# Altium PCB TAUV-Interfacer.PcbDoc (part 2 of 2)
Units mil, origin at the board's own origin, x right, y up, seen from the top; angles counter-clockwise.
Board outline 4460 x 2770 mil, 4 copper layers (Component Side, Ground Plane, Power Plane, Solder Side), stack 33.234 mil thick; 196 components, 135 nets, 730 pads, 0 vias.
Unrouted connection lines stored in the file: 437.
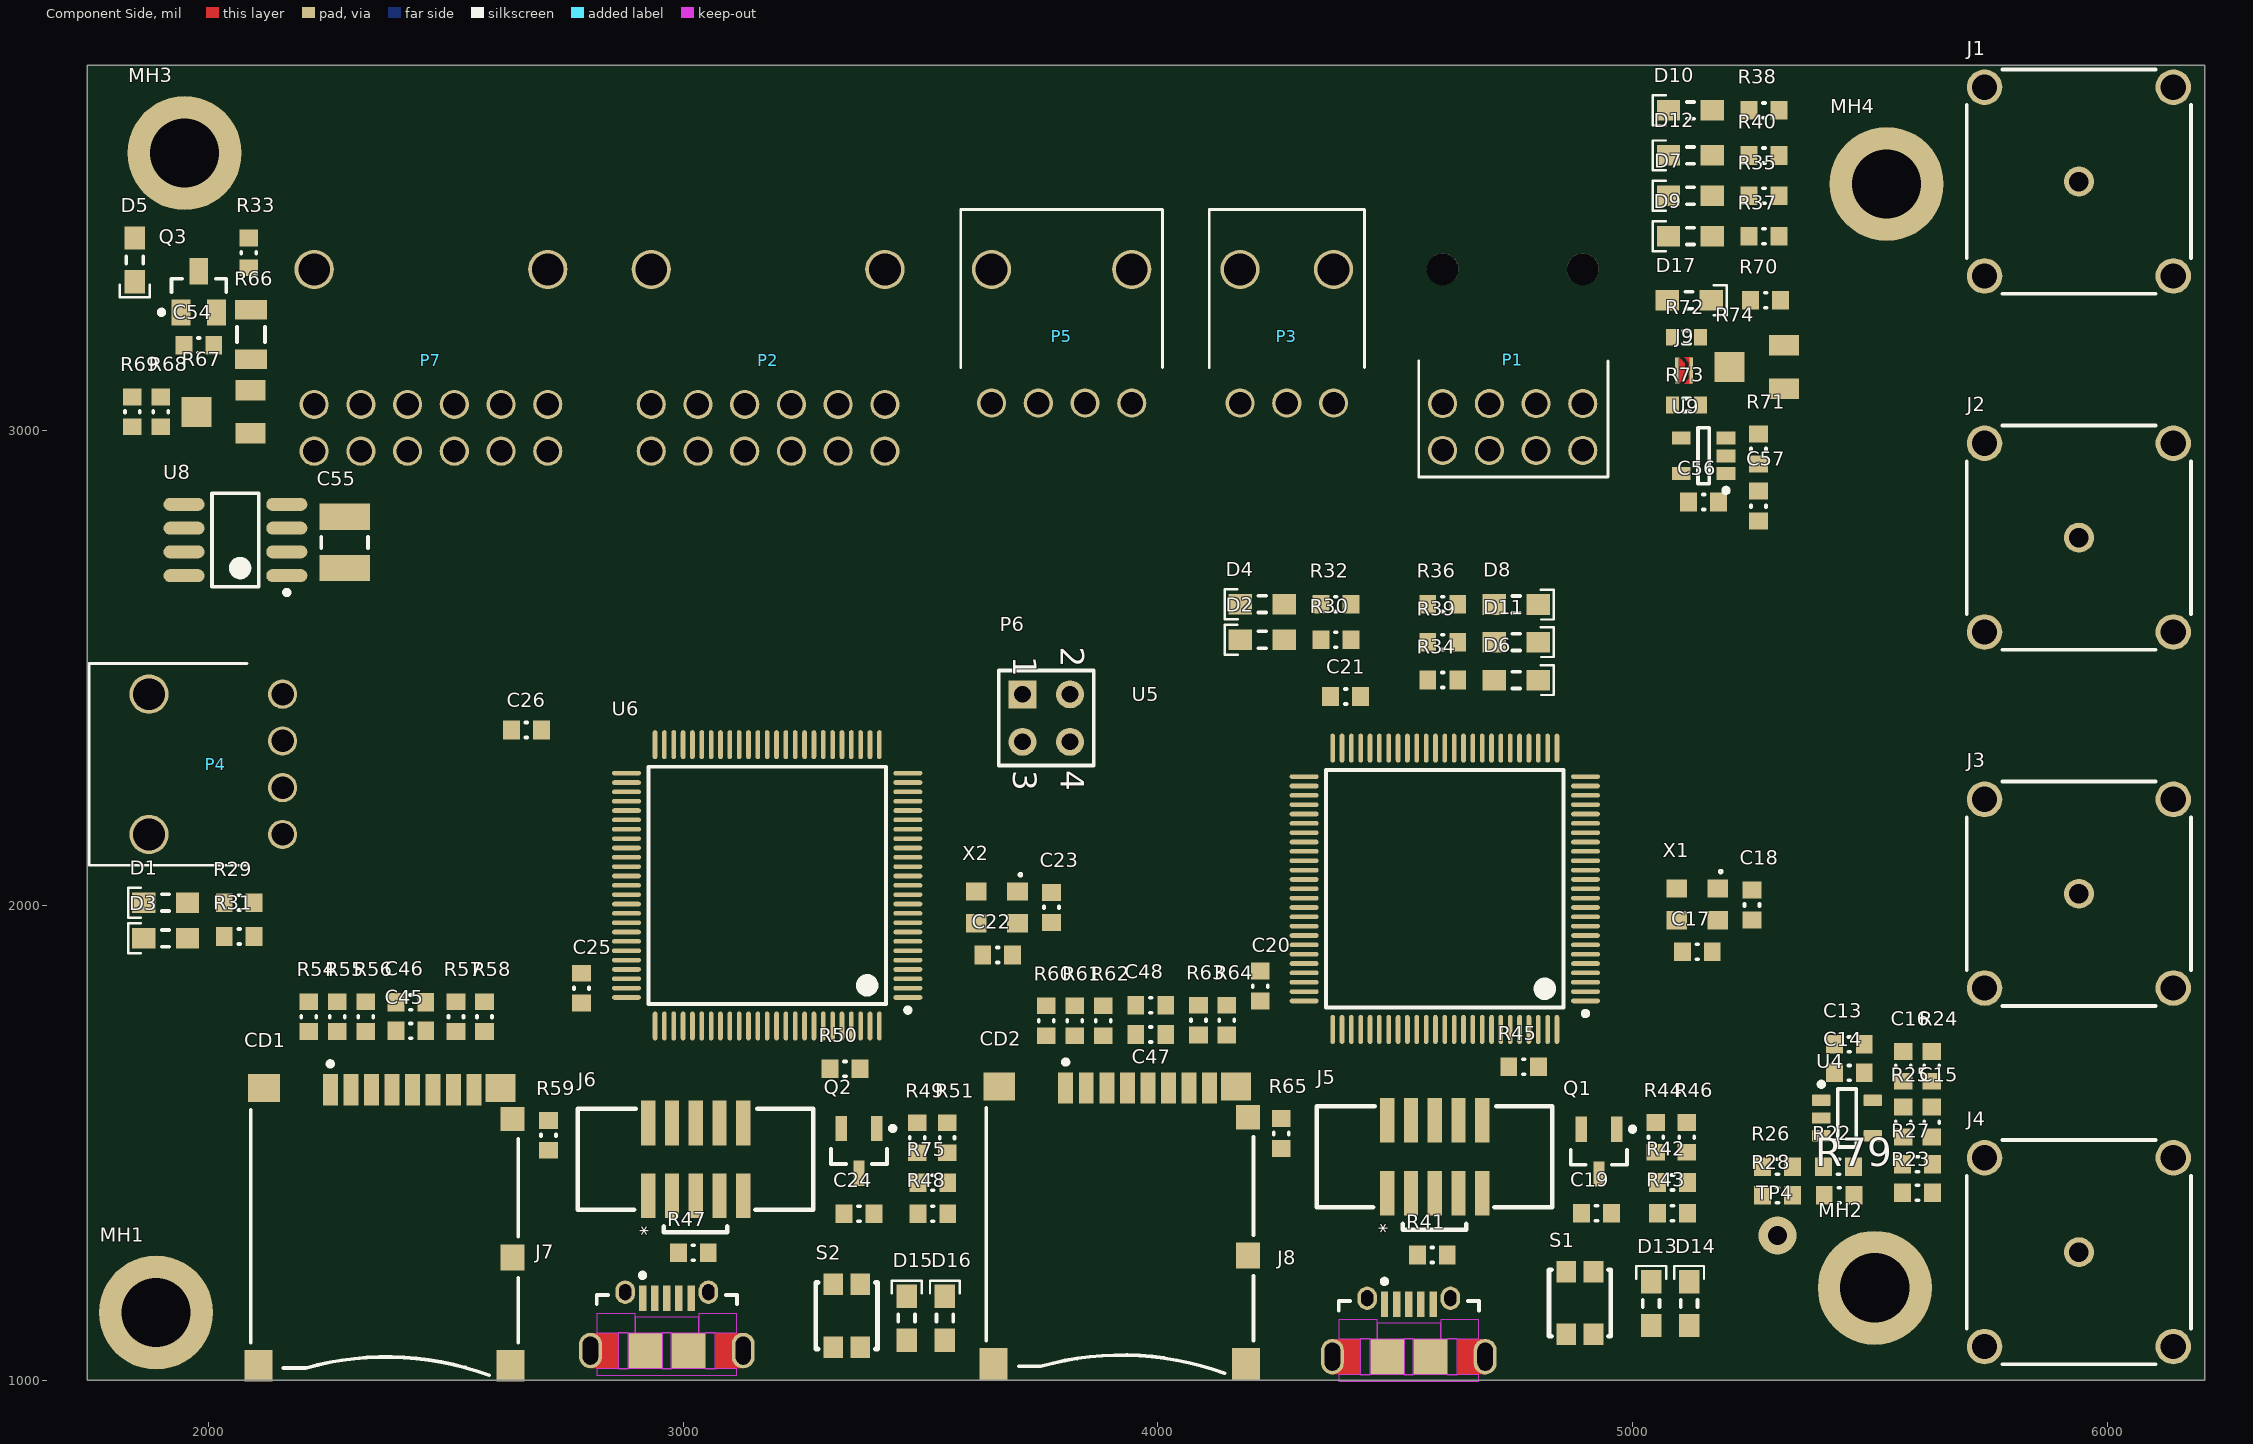
[diagram p0: Component Side view]

## Part data (continued)
X1 X2: "CRYSTAL 25.0000MHZ 10PF SMD", Case/Package=SMD/SMT, ESR (Equivalent Series Resistance)=60R, Frequency=25MHz, Frequency Stability=10ppm, Load Capacitance=10pF, Manufacturer 1=TXC, Max Operating Temperature=70°C, Min Operating Temperature=-20°C, Package Quantity=3000, Supplier Part Number 1=887-1326-1-ND, ComponentLink1Description=https://datasheet.ciiva.com/26918/getdatasheetpartid-757227-26918816.pdf, ComponentLink1URL=https://datasheet.ciiva.com/26918/getdatasheetpartid-757227-26918816.pdf, ComponentLink2Description=https://datasheet.ciiva.com/856/7m-accuracy-856022.pdf, ComponentLink2URL=https://datasheet.ciiva.com/856/7m-accuracy-856022.pdf, ComponentLink3Description=https://datasheet.ciiva.com/22658/1794111-22658486.pdf, ComponentLink3URL=https://datasheet.ciiva.com/22658/1794111-22658486.pdf, ComponentLink4Description=https://datasheet.ciiva.com/856/7m-accuracy-856023.pdf, ComponentLink4URL=https://datasheet.ciiva.com/856/7m-accuracy-856023.pdf, ComponentLink5Description=https://datasheet.ciiva.com/856/7m-accuracy-856024.pdf, ComponentLink5URL=https://datasheet.ciiva.com/856/7m-accuracy-856024.pdf, ComponentLink6Description=https://datasheet.ciiva.com/4946/7m-11184-4946126.pdf, ComponentLink6URL=https://datasheet.ciiva.com/4946/7m-11184-4946126.pdf, ComponentLink7Description=https://datasheet.ciiva.com/28498/1794111-28498878.pdf, ComponentLink7URL=https://datasheet.ciiva.com/28498/1794111-28498878.pdf, Depth=2.5mm, Frequency Tolerance=10ppm, Height=0.031inch, Length=3.2mm, Manufacturer Part Number 1=7M-25.000MEEQ-T, Mount="Surface Mount", Number of Pins=4, Packaging="Tape and Reel", Pricing 1="1=1.27, 10=1.209, 50=1.1812, 100=1.0125, 500=0.9844, 1000=0.8297 (USD)", REACH SVHC="No SVHC", Stock 1=17097, Supplier 1=Digi-Key, Termination=SMD/SMT, Tolerance=10ppm, Width=0.098inch

## Nets (pads, with @x,y where several pads share a name; then routed paths per layer and width w, separated by ;. In a path a pad name is that pad's centre, name@x,y a point inside that pad or via, vN(x,y) a via of type N, cw(c..) or ccw(c..) an arc to the next point about the centre after c; other vN are vias at no path point)
AVCC_3V3: C1.1 C2.2 C5.1 C6.2 C9.1 C10.2 C13.1 C14.2 C40.2 C41.2 C43.2 C44.2 C53.1 FB1.2 R2.2 R5.1 R9.2 R12.1 R16.2 R19.1 R23.2 R26.1 R52.1 R53.1 U1.2 U2.2 U3.2 U4.2 U5.21 U6.21
GND: C1.2 C2.1 C4.1 C5.2 C6.1 C8.1 C9.2 C10.1 C12.1 C13.2 C14.1 C16.1 C17.1 C18.1 C19.1 C20.1 C21.1 C22.1 C23.1 C24.1 C25.1 C26.1 C27.1 C28.1 C29.1 C30.1 C31.1 C32.1 C33.1 C34.1 C35.1 C36.1 C37.1 C38.1 C39.1 C40.1 C41.1 C42.1 C43.1 C44.1 C45.1 C46.1 C47.1 C48.1 C49.1 C50.1 C51.1 C52.1 C53.2 C55.1 C56.2 C57.1 CD1.6 CD1.10 CD1.11 CD1.12 CD1.13 CD1.14 CD2.6 CD2.10 CD2.11 CD2.12 CD2.13 CD2.14 D1.1 D2.1 D3.1 D4.1 D5.1 D6.1 D7.1 D8.1 D9.1 D10.1 D11.1 D12.1 J1.MH J2.MH J3.MH J4.MH J5.3 J5.5 J5.9 J6.3 J6.5 J6.9 J7.5 J7.6 J7.7 J7.8 J7.9 J7.10 J7.11 J8.5 J8.6 J8.7 J8.8 J8.9 J8.10 J8.11 MH1.0 MH2.0 MH3.0 MH4.0 P1.6 P1.7 P2.5 P2.6 P2.11 P2.12 P3.2 P5.1 P7.1 P7.6 P7.7 P7.12 Q1.2 Q2.2 R6.1 R7.1 R13.1 R14.1 R20.1 R21.1 R27.1 R28.1 R41.1 R44.2 R45.2 R46.2 R47.1 R49.2 R50.2 R51.2 R73.2 R74.3 S1.2 S2.2 U1.5 U2.5 U3.5 U4.5 U5.10 U5.19 U5.26 U5.49 U5.74 U5.99 U6.10 U6.19 U6.26 U6.49 U6.74 U6.99 U7.2 U8.4 U9.2 X1.2 X1.4 X2.2 X2.4
HALL_SENSE: P1.3 R70.2 U6.52 U8.2 U9.1
IND_PING: R34.1 U5.54
IND_SCAN: R39.1 U5.52
IND_SEARCH: R36.1 U5.53
MCU1_BOOT: D16.2 P2.2 R50.1 U6.94
MCU1_GPIO1: P4.1 U6.55
MCU1_GPIO2: P4.2 U6.56
MCU1_GPIO3: P4.3 U6.57
MCU1_GPIO4: P4.4 U6.58
MCU1_I2C_SCL: P1.8 P2.4 U6.46
MCU1_I2C_SDA: P1.4 P2.10 U6.47
MCU1_IND1: R29.1 U6.61
MCU1_IND2: R31.1 U6.62
MCU1_NRST: C24.2 J6.10 Q2.3 R48.2 R75.1 S2.1 U6.14
MCU1_OSC_IN: C22.2 U6.12 X2.3
MCU1_OSC_OUT: C23.2 U6.13 X2.1
MCU1_PWM0: P7.3 U6.39
MCU1_PWM1: P7.4 U6.41
MCU1_PWM2: P7.5 U6.43
MCU1_PWM3: P7.9 U6.44
MCU1_PWM4: P7.10 U6.34
MCU1_PWM5: P7.11 U6.35
MCU1_SD_CK: CD1.5 U6.80
MCU1_SD_CMD: CD1.3 R56.1 U6.83
MCU1_SD_D0: CD1.7 R57.1 U6.65
MCU1_SD_D1: CD1.8 R58.1 U6.66
MCU1_SD_D2: CD1.1 R54.1 U6.78
MCU1_SD_D3: CD1.2 R55.1 U6.79
MCU1_SD_DETECT: CD1.9 R59.1 U6.64
MCU1_SPI1_MOSI: P5.3 U6.31
MCU1_SPI1_SCK: P5.2 U6.29
MCU1_TCK: J6.4 U6.76
MCU1_TDI: J6.8 U6.77
MCU1_TDO: J6.6 U6.89
MCU1_TMS: J6.2 U6.72
MCU1_UART4_RX: P2.7 U6.23
MCU1_UART4_TX: P2.1 U6.22
MCU1_USART2_RX: P6.3 U6.25
MCU1_USART2_TX: P6.1 U6.24
MCU1_USB_DM: J7.2 U6.70
MCU1_USB_DP: J7.3 U6.71
MCU2_ADC1_IN10: R76.2 TP1.1 U5.15
MCU2_ADC1_IN11: R77.2 TP2.1 U5.16
MCU2_ADC1_IN12: R78.2 TP3.1 U5.17
MCU2_ADC1_IN13: R79.2 TP4.1 U5.18
MCU2_BOOT: D14.2 P2.8 R45.1 U5.94
MCU2_IND1: R30.1 U5.61
MCU2_IND2: R32.1 U5.62
MCU2_NRST: C19.2 J5.10 Q1.3 R42.1 R43.2 S1.1 U5.14
MCU2_OSC_IN: C17.2 U5.12 X1.3
MCU2_OSC_OUT: C18.2 U5.13 X1.1
MCU2_SD_CK: CD2.5 U5.80
MCU2_SD_CMD: CD2.3 R62.1 U5.83
MCU2_SD_D0: CD2.7 R63.1 U5.65
MCU2_SD_D1: CD2.8 R64.1 U5.66
MCU2_SD_D2: CD2.1 R60.1 U5.78
MCU2_SD_D3: CD2.2 R61.1 U5.79
MCU2_SD_DETECT: CD2.9 R65.1 U5.64
MCU2_TCK: J5.4 U5.76
MCU2_TDI: J5.8 U5.77
MCU2_TDO: J5.6 U5.89
MCU2_TMS: J5.2 U5.72
MCU2_USART2_RX: P6.2 U5.25
MCU2_USART2_TX: P6.4 U5.24
MCU2_USB_DM: J8.2 U5.70
MCU2_USB_DP: J8.3 U5.71
NetC3_1: C3.1 C4.2 R3.2
NetC3_2: C3.2 R2.1 R4.1 R6.2
NetC7_1: C7.1 C8.2 R10.2
NetC7_2: C7.2 R9.1 R11.1 R13.2
NetC11_1: C11.1 C12.2 R17.2
NetC11_2: C11.2 R16.1 R18.1 R20.2
NetC15_1: C15.1 C16.2 R24.2
NetC15_2: C15.2 R23.1 R25.1 R27.2
NetC20_2: C20.2 U5.73
NetC21_2: C21.2 U5.48
NetC25_2: C25.2 U6.73
NetC26_2: C26.2 U6.48
NetC54_1: C54.1 U8.8
NetC57_2: C57.2 R71.2 U9.3
NetD1_2: D1.2 R29.2
NetD2_2: D2.2 R30.2
NetD3_2: D3.2 R31.2
NetD4_2: D4.2 R32.2
NetD5_2: D5.2 R33.1
NetD6_2: D6.2 R34.2
NetD7_2: D7.2 R35.1
NetD8_2: D8.2 R36.2
NetD9_2: D9.2 R37.1
NetD10_2: D10.2 R38.1
NetD11_2: D11.2 R39.2
NetD12_2: D12.2 R40.1
NetD13_1: D13.1 R43.1
NetD14_1: D14.1 R46.1
NetD15_1: D15.1 R48.1
NetD16_1: D16.1 R51.1
NetD17_1: D17.1 R70.1
NetJ1_1: J1.1 R3.1
NetJ2_1: J2.1 R10.1
NetJ3_1: J3.1 R17.1
NetJ4_1: J4.1 R24.1
NetJ5_7: J5.7 R41.2
NetJ6_7: J6.7 R47.2
NetJ9_1: J9.1 R74.2
NetJ9_2: J9.2 R72.2 R73.1 U9.4
NetP2_3: P2.3 Q2.1 R49.1
NetP2_9: P2.9 Q1.1 R44.1
NetP3_3: P3.3 R71.1
NetR1_1: R1.1 R4.2 U1.4
NetR1_2: R1.2 R76.1 U1.1
NetR5_2: R5.2 R7.2 U1.3
NetR8_1: R8.1 R11.2 U2.4
NetR8_2: R8.2 R77.1 U2.1
NetR12_2: R12.2 R14.2 U2.3
NetR15_1: R15.1 R18.2 U3.4
NetR15_2: R15.2 R78.1 U3.1
NetR19_2: R19.2 R21.2 U3.3
NetR22_1: R22.1 R25.2 U4.4
NetR22_2: R22.2 R79.1 U4.1
NetR26_2: R26.2 R28.2 U4.3
NetR52_2: R52.2 U5.20
NetR53_2: R53.2 U6.20
NetR67_2: R67.2 R68.2
NetR68_1: R68.1 U8.5
NetR69_1: R69.1 U8.6
RSENSE-: P7.2 P7.8 R66.1 R67.1 R69.2
SERVOS_GATE: Q3.1 U8.7
VBAT_THRUSTERS: P1.1 R38.2
VCC_3V3: C27.2 C28.2 C29.2 C30.2 C31.2 C32.2 C33.2 C34.2 C35.2 C36.2 C37.2 C38.2 C39.2 C42.2 C45.2 C46.2 C47.2 C48.2 C56.1 CD1.4 CD2.4 D13.2 D15.2 D17.2 FB1.1 J5.1 J6.1 P1.2 P3.1 R37.2 R42.2 R54.2 R55.2 R56.2 R57.2 R58.2 R59.2 R60.2 R61.2 R62.2 R63.2 R64.2 R65.2 R72.1 R74.1 R75.2 U5.6 U5.11 U5.27 U5.50 U5.75 U5.100 U6.6 U6.11 U6.27 U6.50 U6.75 U6.100 U9.5
VCC_5V: C55.2 P1.5 P5.4 Q3.3 R35.2 U8.1
VCC_9V: C51.2 C52.2 R40.2 U7.1
VCC_SERVOS: C54.2 Q3.2 R33.2 R66.2 R67.3
VCC_THRUSTERS: C49.2 C50.2 U7.3
pads on no net: J7.1 J7.4 J8.1 J8.4 P1. P2. P3. P4. P5. P7. U5.1 U5.2 U5.3 U5.4 U5.5 U5.7 U5.8 U5.9 U5.22 U5.23 U5.28 U5.29 U5.30 U5.31 U5.32 U5.33 U5.34 U5.35 U5.36 U5.37 U5.38 U5.39 U5.40 U5.41 U5.42 U5.43 U5.44 U5.45 U5.46 U5.47 U5.51 U5.55 U5.56 U5.57 U5.58 U5.59 U5.60 U5.63 U5.67 U5.68 U5.69 U5.81 U5.82 U5.84 U5.85 U5.86 U5.87 U5.88 U5.90 U5.91 U5.92 U5.93 U5.95 U5.96 U5.97 U5.98 U6.1 U6.2 U6.3 U6.4 U6.5 U6.7 U6.8 U6.9 U6.15 U6.16 U6.17 U6.18 U6.28 U6.30 U6.32 U6.33 U6.36 U6.37 U6.38 U6.40 U6.42 U6.45 U6.51 U6.53 U6.54 U6.59 U6.60 U6.63 U6.67 U6.68 U6.69 U6.81 U6.82 U6.84 U6.85 U6.86 U6.87 U6.88 U6.90 U6.91 U6.92 U6.93 U6.95 U6.96 U6.97 U6.98 U8.3

## Polygon pours and split planes (outlines as drawn)
GND on Ground Plane (split plane): 6184.9,1020.1 1765.1,1020.1 1765.1,3749.9 6184.9,3749.9
VCC_3V3 on Power Plane (split plane): 6184.9,1020.1 5195.1,1020.1 5195.1,3725 5194.71,3726.95 5193.6,3728.6 5191.95,3729.71 5190,3730.1 5188.05,3729.71 5186.4,3728.6 5185.29,3726.95 5184.9,3725 5184.9,1020.1 1765.1,1020.1 1765.1,3749.9 6184.9,3749.9

## Other copper
Power Plane (plane layer: these items are gaps in the copper):
  lines w10: 5190,1000 5190,3725

## Text inside footprints (layer, text, board x,y; h text height)
J5: Top Overlay "*" at 4496.22,1309.61 h30 r90
J6: Top Overlay "*" at 2939.65,1304.19 h30 r90
J7: Mechanical 3 "board edge" at 2685.73,1009.29 h7.87
J8: Mechanical 3 "board edge" at 4248.5,996.52 h7.87
P6: Top Overlay "1" at 3695,2525 h50 r270; Top Overlay "2" at 3795,2545 h50 r270; Top Overlay "4" at 3795,2285 h50 r270; Top Overlay "3" at 3695,2285 h50 r270